# Altium PCB ECG_pcb.PcbDoc
Units mil, origin at the board's own origin, x right, y up, seen from the top; angles counter-clockwise.
Board outline 4740 x 3590 mil, 2 copper layers (Top Layer, Bottom Layer); 28 components, 27 nets, 142 pads, 0 vias.
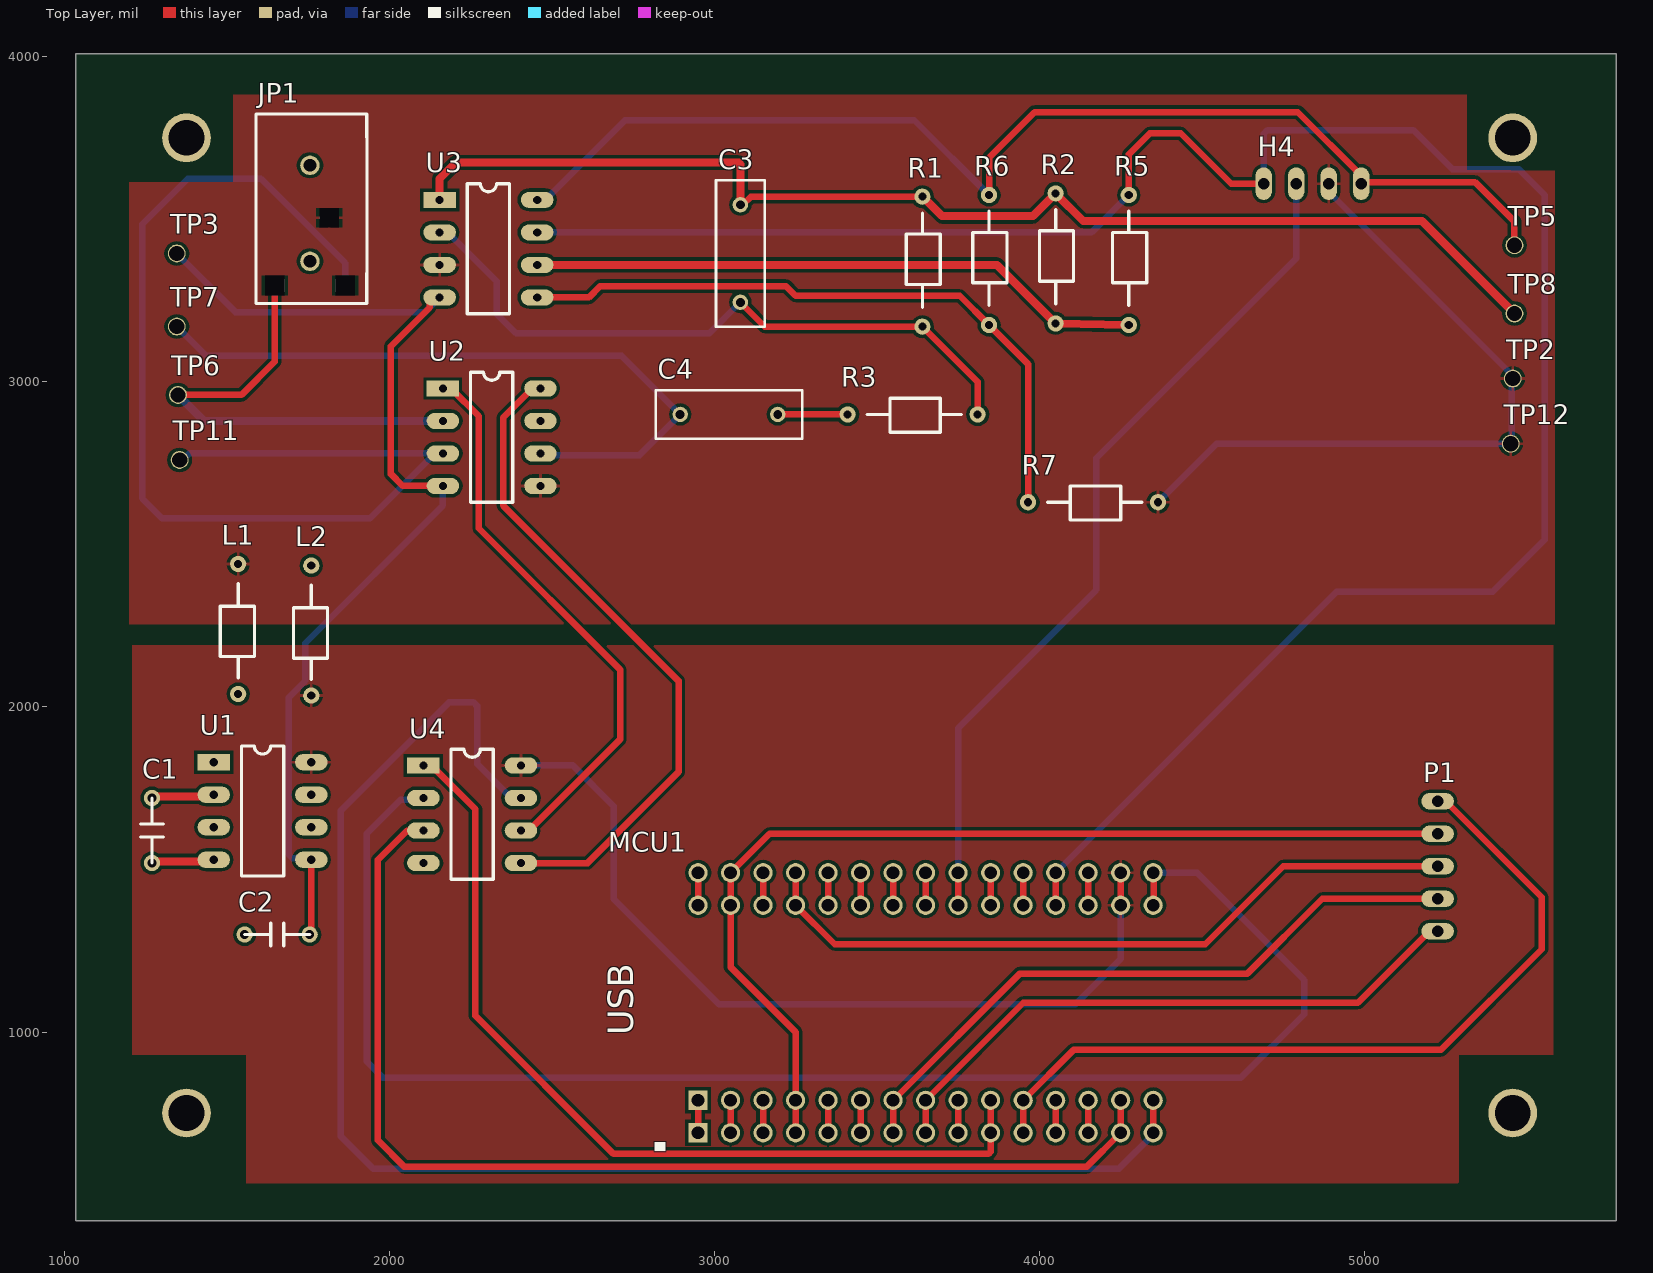
[diagram p0: Top Layer view]
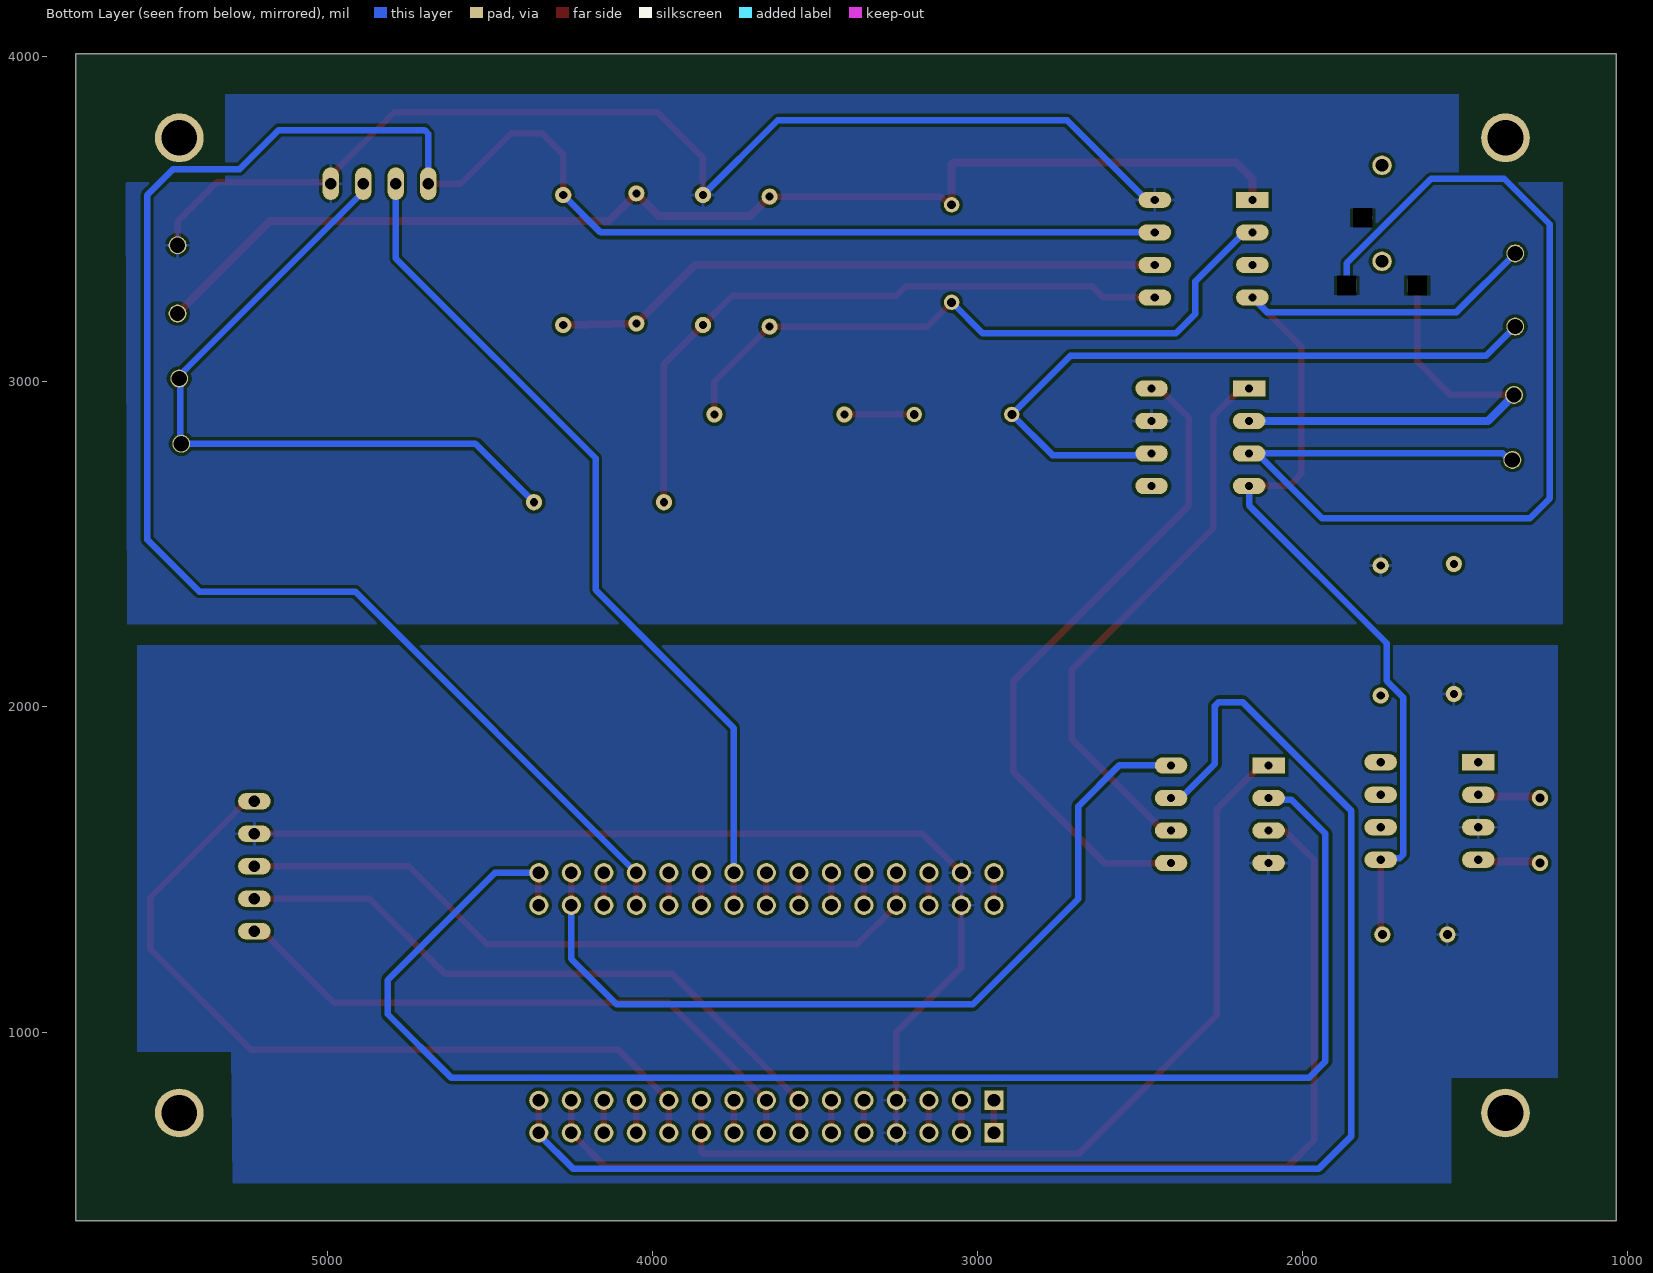
[diagram p1: Bottom Layer view, seen from below]

## Layer stack, top to bottom
Top Solder: solder mask 0.4, Solder Resist, Dk 3.5
Top Layer: signal copper 1.4
Dielectric 1: dielectric 12.6, FR-4, Dk 4.8
Bottom Layer: signal copper 1.4
Bottom Solder: solder mask 0.4, Solder Resist, Dk 3.5

## Board outline
1035,420 5775,420 5775,4010 1035,4010

## Design rules (kind name [scope] priority, off if disabled: settings)
Clearance [All] p1: gap=10 ignorepadtopadclearanceinfootprint=FALSE except(0: Arc-Hole Track-Hole SMDPad-Hole THPad-Hole Via-Hole Fill-Hole Poly-Hole Region-Hole Text-Hole)
PolygonConnect [All] p1: connectstyle=Relief reliefconductorwidth=10 reliefentries=4 polygonreliefangle="90 Angle" airgapwidth=10
RoutingVias [All] p1: holewidth=28 width=50 viastyle="Through Hole" minholewidth=28 minwidth=50 maxholewidth=28 maxwidth=50
SolderMaskExpansion [All] p1: expansion=4
Width Width_1 [All] p1: maxlimit=30 minlimit=15 preferedwidth=20 minimp=50.000000 maximp=50.000000 favimp=50.000000
Width "Schematic Width Constraint" [InNet('Neg_3V3')] p2: maxlimit=20 minlimit=20 preferedwidth=20 minimp=50.000000 maximp=50.000000 favimp=50.000000
Width [All] p3: maxlimit=10 minlimit=10 preferedwidth=10
30 further rules are at their usual default settings.

## Classes and differential pairs
component class "03 Peripherals": P1 U4
component class "02 ECG Amplifier": C1 C2 C3 C4 H4 JP1 L1 L2 MCU1 R1 R2 R3 R5 R6 R7 TP2 TP3 TP5 TP6 TP7 TP8 TP11 TP12 U1 U2 U3

## Components (designator, comment, footprint, x,y, rotation, side; value= is the part's Value field where it differs from the comment)
C1 "Cap-10u" Capacitor 1270,1520 r90 top
C2 "Cap-10u" Capacitor 1555,1300 r0 top
C3 "Cap" RAD-0.3 3080,3395 r90 top value=100pF
C4 "Cap" RAD-0.3 3045,2900 r0 top
H4 "Header4x1" "4 pin header" 4990,3610 r270 top
JP1 "Audio Jack" "Audio Jack" 1755.94,3823.9 r270 top
L1 "FerriteBead" RESISTOR 1535,2440 r270 top
L2 "FerriteBead" RESISTOR 1760,2435 r270 top
MCU1 "Nucleo F303K8_FINISHED" "Nucleo F303K8" 3650,1090 r90 top
P1 "SEN-14045" "5 pin header" 5225,1710 r0 top
R1 "Res-3M" RESISTOR 3640,3170 r90 top
R2 "20k" RESISTOR 4050,3180 r90 top
R3 "15k" RESISTOR 3410,2900 r0 top
R5 "Res-10k" RESISTOR 4275,3175 r90 top
R6 "20k" RESISTOR 3845,3175 r90 top
R7 "Res-10k" RESISTOR 3965,2630 r0 top
TP2 "TestPoint" TestPoint 5455,3010 r90 top
TP3 "TestPoint" TestPoint 1345,3395 r90 top
TP5 "TestPoint" TestPoint 5460,3420 r90 top
TP6 "TestPoint" TestPoint 1348.74,2959.68 r90 top value="Left Arm"
TP7 "TestPoint" TestPoint 1345,3170 r90 top
TP8 "TestPoint" TestPoint 5460,3210 r90 top
TP11 "TestPoint" TestPoint 1353.74,2759.68 r90 top value="Right Arm"
TP12 "TestPoint" TestPoint 5448.74,2809.68 r90 top value="Right Leg"
U1 "TC962" DIP8 1460,1830 r0 top
U2 "LT1920" DIP8 2165,2980 r0 top
U3 "TL072" DIP8 2155,3560 r0 top
U4 "MCP4132-103E/P" DIP8 2105,1820 r0 top

## Footprints (in the part's own frame and the unit in brackets; to place one, negate y for a bottom-side part, rotate by r counter-clockwise, add the part's x,y. Pads: shape width x height; smd on the part's side, far side on the other; paste and mask are expansions set on the pad)
"4 pin header" [mm]
  oval 2.54x1.27 hole 0.9: 1(0,0) 2(0,-2.54) 3(0,-5.08) 4(0,-7.62)
"5 pin header" [mm]
  oval 2.54x1.27 hole 0.9: 1(0,0) 2(0,-2.54) 3(0,-5.08) 4(0,-7.62) 5(0,-10.16)
"Audio Jack" [mm] "2092-STX-3000-ND"
  oval 1x1.5 hole 1.5 square mask+0.013: 1(8.1,1.5)
  round 1.524 hole 1: 2(11.5,0)
  rect 1x1.5 hole 1.5 square mask+0.013: 2(13.4,-2.75) 3(13.4,2.75)
  round 1.524 hole 1 unplated: 5(4,0)
  silkscreen extent 0,-4.22 14.81,4.46
Capacitor [mil] "200 mil"
  round 50 hole 28: 1(0,0) 2(200,0)
  silkscreen extent 0,-35 200,35
DIP8 [mil]
  rect 100x50 hole 25: 1(0,0)
  oval 100x50 hole 25: 2(0,-100) 3(0,-200) 4(0,-300) 5(300,-300) 6(300,-200) 7(300,-100) 8(300,0)
  silkscreen extent 85,-350 215,50
"Nucleo F303K8" [mm] "Nucleo Header"
  rect 1.5x1.5 hole 1: 1(-10.16,17.78) 1(-7.62,17.78)
  round 1.5 hole 1: 2(-10.16,15.24) 2(-7.62,15.24) 3(-10.16,12.7) 3(-7.62,12.7) 4(-10.16,10.16) 4(-7.62,10.16) 5(-10.16,7.62) 5(-7.62,7.62) 6(-10.16,5.08) 6(-7.62,5.08) 7(-10.16,2.54) 7(-7.62,2.54) 8(-10.16,0) 8(-7.62,0) 9(-10.16,-2.54) 9(-7.62,-2.54) 10(-10.16,-5.08) 10(-7.62,-5.08) 11(-10.16,-7.62) 11(-7.62,-7.62) 12(-10.16,-10.16) 12(-7.62,-10.16) 13(-10.16,-12.7) 13(-7.62,-12.7) 14(-10.16,-15.24) 14(-7.62,-15.24) 15(-10.16,-17.78) 15(-7.62,-17.78) 16(7.62,-17.78) 16(10.16,-17.78) 17(7.62,-15.24) 17(10.16,-15.24) 18(7.62,-12.7) 18(10.16,-12.7) 19(7.62,-10.16) 19(10.16,-10.16) 20(7.62,-7.62) 20(10.16,-7.62) 21(7.62,-5.08) 21(10.16,-5.08) 22(7.62,-2.54) 22(10.16,-2.54) 23(7.62,0) 23(10.16,0) 24(7.62,2.54) 24(10.16,2.54) 25(7.62,5.08) 25(10.16,5.08) 26(7.62,7.62) 26(10.16,7.62) 27(7.62,10.16) 27(10.16,10.16) 28(7.62,12.7) 28(10.16,12.7) 29(7.62,15.24) 29(10.16,15.24) 30(7.62,17.78) 30(10.16,17.78)
  Top Layer lines w0.508: -10.16,17.78 -7.62,17.78 ; 7.62,17.78 10.16,17.78 ; -10.16,15.24 -7.62,15.24 ; 7.62,15.24 10.16,15.24 ; -10.16,12.7 -7.62,12.7 ; 7.62,12.7 10.16,12.7 ; -10.16,10.16 -7.62,10.16 ; 7.62,10.16 10.16,10.16 ; -10.16,7.62 -7.62,7.62 ; 7.62,7.62 10.16,7.62 ; -10.16,5.08 -7.62,5.08 ; 7.62,5.08 10.16,5.08 ; -10.16,2.54 -7.62,2.54 ; 7.62,2.54 10.16,2.54 ; -10.16,0 -7.62,0 ; 7.62,0 10.16,0 ; -10.16,-2.54 -7.62,-2.54 ; 7.62,-2.54 10.16,-2.54 ; -10.16,-5.08 -7.62,-5.08 ; 7.62,-5.08 10.16,-5.08 ; -10.16,-7.62 -7.62,-7.62 ; 7.62,-7.62 10.16,-7.62 ; -10.16,-10.16 -7.62,-10.16 ; 7.62,-10.16 10.16,-10.16 ; -10.16,-12.7 -7.62,-12.7 ; 7.62,-12.7 10.16,-12.7 ; -10.16,-15.24 -7.62,-15.24 ; 7.442,-15.265 7.62,-15.265 9.982,-15.265 ; -10.16,-17.78 -7.62,-17.78 ; 7.722,-17.831 10.16,-17.831 10.262,-17.831
RAD-0.3 [mm] "Radial Cap, Thru-Hole; 2 Leads; 0.3 in Pin Spacing"
  round 1.2 hole 0.7: 1(-3.81,0) 2(3.81,0)
  silkscreen extent -5.71,-1.91 5.71,1.91
RESISTOR [mil]
  round 50 hole 25: 1(0,0) 2(400,0)
  silkscreen extent 60,-55 350,50
TestPoint [mil]
  round 55 hole 47 mask+3: 1(0.32,-1.26)

## Part data
C1 C2: Capacitance=10µF, Manufacturer="TDK Corporation", Manufacturer Part Number=FK26X7R1C106K, Operating Temperature="-55°C ~ 125°C", Package / Case=Radial, Ratings=-, Supplier Part Number 1=445-8549-ND, Temperature Coefficient=X7R, Tolerance=±10%, Voltage - Rated=16V, Applications="General Purpose", Category=Capacitors, ComponentLink1Description=https://product.tdk.com/info/en/documents/catalog/leadmlcc_conventional_fk_en.pdf, ComponentLink1URL=https://product.tdk.com/info/en/documents/catalog/leadmlcc_conventional_fk_en.pdf, Features=-, Height - Seated (Max)="0.236\" (6.00mm)", Lead Spacing="0.197\" (5.00mm)", Lead Style="Formed Leads - Kinked", Mounting Type="Through Hole", Packaging=Bulk, Pricing 1="1=0.45, 10=0.319, 100=0.2101, 250=0.17896, 500=0.1556, 1000=0.13226, 5000=0.1167, 10000=0.10892, 25000=0.10503 (USD)", RoHS="RoHS Compliant", Size / Dimension="0.217\" L x 0.138\" W (5.50mm x 3.50mm)", Stock 1=7933, Supplier 1=Digi-Key, Thickness (Max)=-
C3 C4: "Capacitor", LatestRevisionDate=17-Jul-2002, LatestRevisionNote="Re-released for DXP Platform.", PackageDescription="Radial Cap, Thru-Hole; 2 Leads; 0.3 in Pin Spacing", PackageReference=RAD-0.3, Published=8-Jun-2000, Publisher="Altium Limited"
  C4: =22µF
JP1: Body Color=Black, Current Rating=1A, Insulation Color=-, Manufacturer="CUI Inc.", Manufacturer Part Number=SJ-3524-SMT-TR, Supplier Part Number 1=CP-3524SJCT-ND, Voltage - Rated=12VDC, Actual Diameter="0.142\" (3.60mm)", Body Material=-, Category="Connectors, Interconnects", ComponentLink1Description=http://www.cui.com/product/resource/digikeypdf/sj-352x-smt_series.pdf, ComponentLink1URL=http://www.cui.com/product/resource/digikeypdf/sj-352x-smt_series.pdf, Connector Type="Phone Jack", Contact Material - Plating=Silver, Features="Board Guide", Gender=Female, Includes="1 pc - 1 Connector", Industry Recognized Mating Diameter="3.50mm (0.141\", 1/8\", Mini Plug) - Headphone", Internal Switch(s)="Single Switch", Mating Length/Depth="0.551\" (14.00mm)", Mounting Type="Surface Mount, Right Angle", Number of Positions/Contacts="3 Conductors, 4 Contacts", Packaging="Cut Tape (CT)", Pricing 1="1=1.37, 10=1.063, 100=0.811, 500=0.64746 (USD)", RoHS="RoHS Compliant", Shielding=Unshielded, Signal Lines=Stereo, Stock 1=106742, Supplier 1=Digi-Key, Termination=Solder
L1 L2: Current Rating (Max)=5A, DC Resistance (DCR) (Max)="10 mOhm", Impedance @ Frequency="75 Ohm @ 100MHz", Manufacturer="Laird-Signal Integrity Products", Manufacturer Part Number=28L0138-10R-10, Operating Temperature=-, Package / Case=Axial, Supplier Part Number 1=240-2438-1-ND, Category=Filters, ComponentLink1Description=http://media.digikey.com/pdf/Data%20Sheets/Laird%20Technologies/28L0138-10R-10_Dwg.pdf, ComponentLink1URL=http://media.digikey.com/pdf/Data%20Sheets/Laird%20Technologies/28L0138-10R-10_Dwg.pdf, Filter Type=-, Height (Max)=-, Mounting Type="Through Hole", Number of Lines=1, Packaging="Cut Tape (CT)", Part Status=Active, Pricing 1="1=0.1, 10=0.076, 25=0.0684, 50=0.05, 100=0.0433, 250=0.03416, 500=0.02884, 1000=0.02429 (USD)", Ratings=-, RoHS="RoHS Compliant", Size / Dimension="0.138\" Dia x 0.175\" L (3.51mm x 4.45mm)", Stock 1=25546, Supplier 1=Digi-Key
MCU1: "Nucleo F303K8", Current Rating=3A, Insulation Color=Black, Manufacturer="Sullins Connector Solutions", Manufacturer Part Number=PPTC151LFBN-RC, Material Flammability Rating="UL94 V-0", Operating Temperature="-40°C ~ 105°C", Supplier Part Number 1=S7013-ND, Voltage Rating=250V, Applications=-, Category="Connectors, Interconnects", ComponentLink1Description=http://www.sullinscorp.com/drawings/78_P(N)PxCxxxLFBN-RC,_10492-H.pdf, ComponentLink1URL=http://www.sullinscorp.com/drawings/78_P(N)PxCxxxLFBN-RC,_10492-H.pdf, Connector Type=Header, Contact Finish - Mating=Tin, Contact Finish - Post=Tin, Contact Finish Thickness - Mating=-, Contact Finish Thickness - Post=-, Contact Length - Post="0.126\" (3.20mm)", Contact Material="Phosphor Bronze", Contact Shape=Square, Contact Type="Female Socket", Fastening Type=Push-Pull, Features=-, Ingress Protection=-, Insulation Height="0.335\" (8.51mm)", Insulation Material=Polyester, Mated Stacking Heights=-, Mounting Type="Through Hole", Number of Positions=15, Number of Positions Loaded=All, Number of Rows=1, Packaging=Bulk, Part Status=Active, Pitch - Mating="0.100\" (2.54mm)", Pricing 1="1=1.22, 10=1.013, 25=0.9376, 50=0.8438, 100=0.75, 250=0.65624, 500=0.6, 1000=0.54375, 2500=0.4875 (USD)", RoHS="RoHS Compliant", Row Spacing - Mating=-, Stock 1=2938, Style="Board to Board", Supplier 1=Digi-Key, Termination=Solder
P1: "Pulse Ox"
R1: Manufacturer="Stackpole Electronics Inc.", Manufacturer Part Number=CF14JT30K0, Operating Temperature="-55°C ~ 155°C", Package / Case=Axial, Power (Watts)="0.25W, 1/4W", Resistance (Ohms)=3Meg, Temperature Coefficient="0/ -500ppm/°C", Tolerance=±5%, Category=Resistors, ComponentLink1Description=https://www.seielect.com/Catalog/SEI-CF_CFM.pdf, ComponentLink1URL=https://www.seielect.com/Catalog/SEI-CF_CFM.pdf, Composition="Carbon Film", Failure Rate=-, Features="Flame Retardant Coating, Safety", Height - Seated (Max)=-, Packaging="Cut Tape (CT)", Part Status=Active, RoHS="RoHS Compliant", Size / Dimension="0.091\" Dia x 0.236\" L (2.30mm x 6.00mm)", Supplier 1=Arrow, Supplier Device Package=Axial
R2 R6: library part Res-20k, Supplier 1=Arrow
R3: library part Res-15k, Supplier 1=Arrow
R5 R7: Manufacturer="Stackpole Electronics Inc.", Manufacturer Part Number=CF14JT10K0, Operating Temperature="-55°C ~ 155°C", Package / Case=Axial, Power (Watts)="0.25W, 1/4W", Resistance (Ohms)=10k, Supplier Part Number 1=CF14JT10K0CT-ND, Temperature Coefficient="0/ -500ppm/°C", Tolerance=±5%, Category=Resistors, ComponentLink1Description=http://www.seielect.com/catalog/SEI-CF_CFM.pdf, ComponentLink1URL=http://www.seielect.com/catalog/SEI-CF_CFM.pdf, Composition="Carbon Film", Features="Flame Retardant Coating, Safety", Height=-, Number of Terminations=2, Packaging="Cut Tape (CT)", Pricing 1="1=0.1, 10=0.04, 50=0.022, 100=0.0162, 250=0.01236, 500=0.0099, 1000=0.00729, 2500=0.00632 (USD)", RoHS="RoHS Compliant", Size / Dimension="0.091\" Dia x 0.256\" L (2.30mm x 6.50mm)", Stock 1=1509635, Supplier 1=Digi-Key, Supplier Device Package=Axial
U1: Supplier Part Number 1=TC962CPA-ND, Supplier 1=Digi-Key
U2: Supplier Part Number 1=LT1920CN8#PBF-ND, Supplier 1=Digi-Key
U3: Current - Output / Channel=-, Current - Supply=1.4mA, Manufacturer="Texas Instruments", Manufacturer Part Number=TL072IP, Operating Temperature="-40°C ~ 85°C", Package / Case="8-DIP (0.300\", 7.62mm)", Supplier Device Package=8-PDIP, Supplier Part Number 1=296-14997-5-ND, Voltage - Supply, Single/Dual (±)="7 V ~ 36 V, ±3.5 V ~ 18 V", -3db Bandwidth=-, Amplifier Type=J-FET, Category="Integrated Circuits (ICs)", ComponentLink1Description=http://www.ti.com/lit/ds/symlink/tl071a.pdf, ComponentLink1URL=http://www.ti.com/lit/ds/symlink/tl071a.pdf, Mounting Type="Through Hole", Number of Circuits=2, Output Type=-, Packaging=Tube, Part Status=Active, Pricing 1="1=0.69, 10=0.607, 100=0.4655, 500=0.368, 1000=0.2944 (USD)", RoHS="RoHS Compliant", Slew Rate="13 V/µs", Stock 1=2537, Supplier 1=Digi-Key
U4: "Digital Pot"
TP2 TP3 TP5 TP6 TP7 TP8 TP11 TP12: Usage=DNP

## Free pads (board coordinates)
  round 150 hole 110: 2(1376,751) 2(1376,3751) 2(5456,751) 2(5456,3751)

## Nets (pads, with @x,y where several pads share a name; then routed paths per layer and width w, separated by ;. In a path a pad name is that pad's centre, name@x,y a point inside that pad or via, vN(x,y) a via of type N, cw(c..) or ccw(c..) an arc to the next point about the centre after c; other vN are vias at no path point)
3V3: L2.2 MCU1.17 U1.8 U4.8 | length 2539.4
  Bottom Layer w20: U4.8 2565,1820 2690,1695 2690,1410 3015,1085 4110,1085 4250,1225 MCU1.17@4250,1390
5V: MCU1.27 P1.3 | length 2124.1
  Top Layer w20: MCU1.27@3250,1390 3370,1270 4510,1270 4750,1510 P1.3
A3V3: H4.1 L2.1 R6.2 TP5.1 U2.7 U3.8 | length 3607.5
  Top Layer w20: R6.2 3845,3690 3985,3830 4795,3830 4990,3635 H4.1 4995,3615 5340,3615 5461.26,3493.74 TP5.1
  Bottom Layer w20: U3.8 2480,3560 2725,3805 3615,3805 R6.2
AGND: H4.2 JP1.1 L1.1 R7.2 TP2.1 TP12.1 U2.5 U3.3 | length 2269.3
  Top Layer w10: U3.3 U3.3@2177.57,3360
  Bottom Layer w10: U3.3 U3.3@2180,3360 ; H4.2 H4.2@4890,3635
  Bottom Layer w20: R7.2 4545,2810 TP12.1 5453.13,2813.13 5453.13,3007.19 TP2.1 5456.26,3018.74 4890,3585 H4.2
Aout: H4.3 MCU1.22 | length 2550.8
  Bottom Layer w20: MCU1.22@3750,1490 3750,1935 4175,2360 4175,2765 4790,3380 H4.3
DigiPot_CS: MCU1.10 U4.1 | length 2673
  Top Layer w20: U4.1 2130,1820 2265,1685 2265,1050 2690,625 3843.28,625 3850,631.72 MCU1.10@3850,690
DigiPot_SCK: MCU1.16 U4.2 | length 4613.7
  Bottom Layer w20: U4.2 2100,1715 2035,1715 1930,1610 1930,910 1980,860 4620,860 4815,1055 4815,1160 4485,1490 MCU1.16@4350,1490
DigiPot_SDI: MCU1.14 U4.3 | length 3402.9
  Top Layer w20: U4.3 2055,1620 1965,1530 1965,666.72 2046.72,585 4145,585 MCU1.14@4250,690
DigiPot_SDO: MCU1.15 U4.7 | length 4510.3
  Bottom Layer w20: U4.7 2375,1720 2270,1825 2270,2003.28 2258.28,2015 2185,2015 1850,1680 1850,680 1950,580 4245,580 4350,685 MCU1.15@4350,690
Final_Signal: H4.4 MCU1.19 R5.2 U3.7 | length 6640.1
  Top Layer w10: R5.2 R5.2@4282.5,3582.5 ; H4.4@4671.52,3582.5 4690,3600.98 H4.4
  Top Layer w20: R5.2 4275,3700 4340,3765 4435,3765 4590,3610 H4.4
  Bottom Layer w20: U3.7 4160,3460 R5.2 ; MCU1.19@4050,1490 4915,2355 5395,2355 5555,2515 5555,3575 5475,3655 5270,3655 5150,3775 4701.72,3775 4690,3763.28 H4.4
GND: C2.1 L1.2 MCU1.4 MCU1.29 P1.2 U1.3 U4.4 | length 2907.5
  Top Layer w20: MCU1.29@3050,1390 3050,1200 3250,1000 MCU1.4@3250,790 ; MCU1.29@3050,1490 3170,1610 P1.2
LeftArm: JP1.2@1647.68,3296.34 TP6.1 U2.2 | length 1451.2
  Top Layer w10: U2.2 2168.09,2880 U2.2@2186.57,2861.52
  Top Layer w20: TP6.1 1545,2960 1647.68,3062.68 JP1.2@1647.68,3296.34
  Bottom Layer w25: TP6.1 1430,2880 U2.2
Neg_3V3: C2.2 TP3.1 U1.5 U2.4 U3.4 | length 3331.6
  Top Layer w20: C2.2 1760,1305 U1.5 ; U3.4 2138.12,3260 2124.26,3246.14 2124.26,3229.26 2005,3110 2005,2716.72 2041.72,2680 U2.4
  Bottom Layer w20: TP3.1 1526.57,3215 2110,3215 U3.4 ; U1.5 1755,1535 1701.72,1535 1690,1546.72 1690,2028.64 1741.36,2080 1741.36,2196.36 2165,2620 U2.4
NetC1_1: C1.1 U1.4 | length 194.1
  Top Layer w10: C1.1 C1.1@1275,1525 ; U1.4@1455,1525 U1.4
  Top Layer w25: C1.1@1275,1525 U1.4@1455,1525
NetC1_2: C1.2 U1.2 | length 194.1
  Top Layer w10: C1.2 C1.2@1275,1725 ; U1.2@1455,1725 U1.2
  Top Layer w25: C1.2@1275,1725 U1.2@1455,1725
NetC3_1: C3.1 R1.1 R3.2 U3.2 | length 2082.8
  Top Layer w20: C3.1 3155,3170 R1.1 3810,3000 R3.2
  Bottom Layer w20: U3.2 2180,3460 2330,3310 2330,3210 2390,3150 2985,3150 C3.1
NetC4_1: C4.1 TP7.1 U2.6 | length 2169.6
  Bottom Layer w10: U2.6 U2.6@2490,2780
  Bottom Layer w20: TP7.1 1436.57,3080 2715,3080 C4.1 2770,2775 2470,2775 U2.6
NetC4_2: C4.2 R3.1 | length 215
  Top Layer w20: C4.2 R3.1
NetR2_1: R2.1 R5.1 U3.6 | length 1894.6
  Top Layer w25: U3.6 3850,3360 3870,3360 R2.1 R5.1
NetR6_1: R6.1 R7.1 U3.5 | length 2048.9
  Top Layer w20: U3.5 2614.06,3260 2649.06,3295 3220,3295 3250,3265 3755,3265 R6.1 3965,3055 R7.1
P0B: U2.1 U4.6 | length 1741.4
  Top Layer w20: U2.1 2190,2980 2275,2895 2275,2550 2710,2115 2710,1900 2430,1620 U4.6
P02: U2.8 U4.5 | length 2107.2
  Top Layer w20: U4.5 2610,1520 2890,1800 2890,2080 2350,2620 2350,2890 2440,2980 U2.8
  Bottom Layer w10: U2.8 2479.18,2980 U2.8@2497.65,2961.52
PulseOx_INT: MCU1.11 P1.1 | length 2389.8
  Top Layer w20: MCU1.11@3950,790 4105,945 5235,945 5545,1255 5545,1415 5250,1710 P1.1
PulseOx_SCL: MCU1.8 P1.5 | length 1790.4
  Top Layer w20: MCU1.8@3650,790 3950,1090 4980,1090 5200,1310 P1.5
PulseOx_SDA: MCU1.7 P1.4 | length 1931.8
  Top Layer w20: MCU1.7@3550,790 3940,1180 4640,1180 4870,1410 P1.4
RightArm: JP1.3 TP11.1 U2.3 | length 3529
  Bottom Layer w20: TP11.1 1364.47,2760 1384.47,2780 U2.3@2140,2780 ; JP1.3 1864.21,3365.79 1605,3625 1380,3625 1240,3485 1240,2641.72 1301.72,2580 1940,2580 U2.3@2140,2780 ; U2.3 U2.3@2140,2780
Signal_Amplified: C3.2 R1.2 R2.2 TP8.1 U3.1 | length 3760.9
  Top Layer w20: C3.2 3087.37,3545 3112.37,3570 R1.2
  Top Layer w25: U3.1@2180,3560 U3.1 2155,3625 2205,3675 3074.14,3675 3080,3669.14 C3.2 ; R1.2 3700,3510 3980,3510 R2.2 4135,3495 5176.57,3495 TP8.1
pads on no net: JP1.2@1755.94,3371.14 JP1.5 MCU1.1 MCU1.2 MCU1.3 MCU1.5 MCU1.6 MCU1.9 MCU1.12 MCU1.13 MCU1.18 MCU1.20 MCU1.21 MCU1.23 MCU1.24 MCU1.25 MCU1.26 MCU1.28 MCU1.30 U1.1 U1.6 U1.7

## Polygon pours and split planes (outlines as drawn)
AGND on Top Layer "Top Layer-AGND" (solid, pour order 0): 1520,3615 1520,3884.15 5315,3884.15 5315,3653.27 5585,3649.06 5585,2255 1200,2255 1200,3615
3V3 on Top Layer "Top Layer-3V3" (solid, pour order 8): 1210,2190 1210,930 1560,930 1560,535.07 5290,535 5290,930 5580,930 5580,2190
A3V3 on Bottom Layer "Bottom Layer-A3V3" (solid, pour order 6): 1520,3615 1520,3885 5315,3885 5315,3615 5621.43,3615 5616.69,2255 1200,2255 1200,3615
GND on Bottom Layer "Bottom Layer-GND" (solid, pour order 4): 1215,2190 5585,2190 5585,940 5296.69,940 5291.81,535 1543.72,535 1543.72,859.33 1215,859.33

## Other copper
Multi-Layer:
  pour cut-out: 1160,1210

## Silkscreen, mask and mechanical layers (free items; w line width, h text height)
Mechanical 1:
  lines w10: 1035,420 1035,4010 1040,4010 5770,4010 5770,425 5765,420 1035,420

## Text inside footprints (layer, text, board x,y; h text height)
MCU1: Top Overlay "USB" at 2750,990 h78.74 r90